# Altium PCB PCB1.PcbDoc (part 1 of 2)
Units mm, origin at the board's own origin, x right, y up, seen from the top; angles counter-clockwise.
Board outline 101 x 101.73 mm, 2 copper layers (Top Layer, Bottom Layer); 185 components, 17 nets, 503 pads, 7 vias.
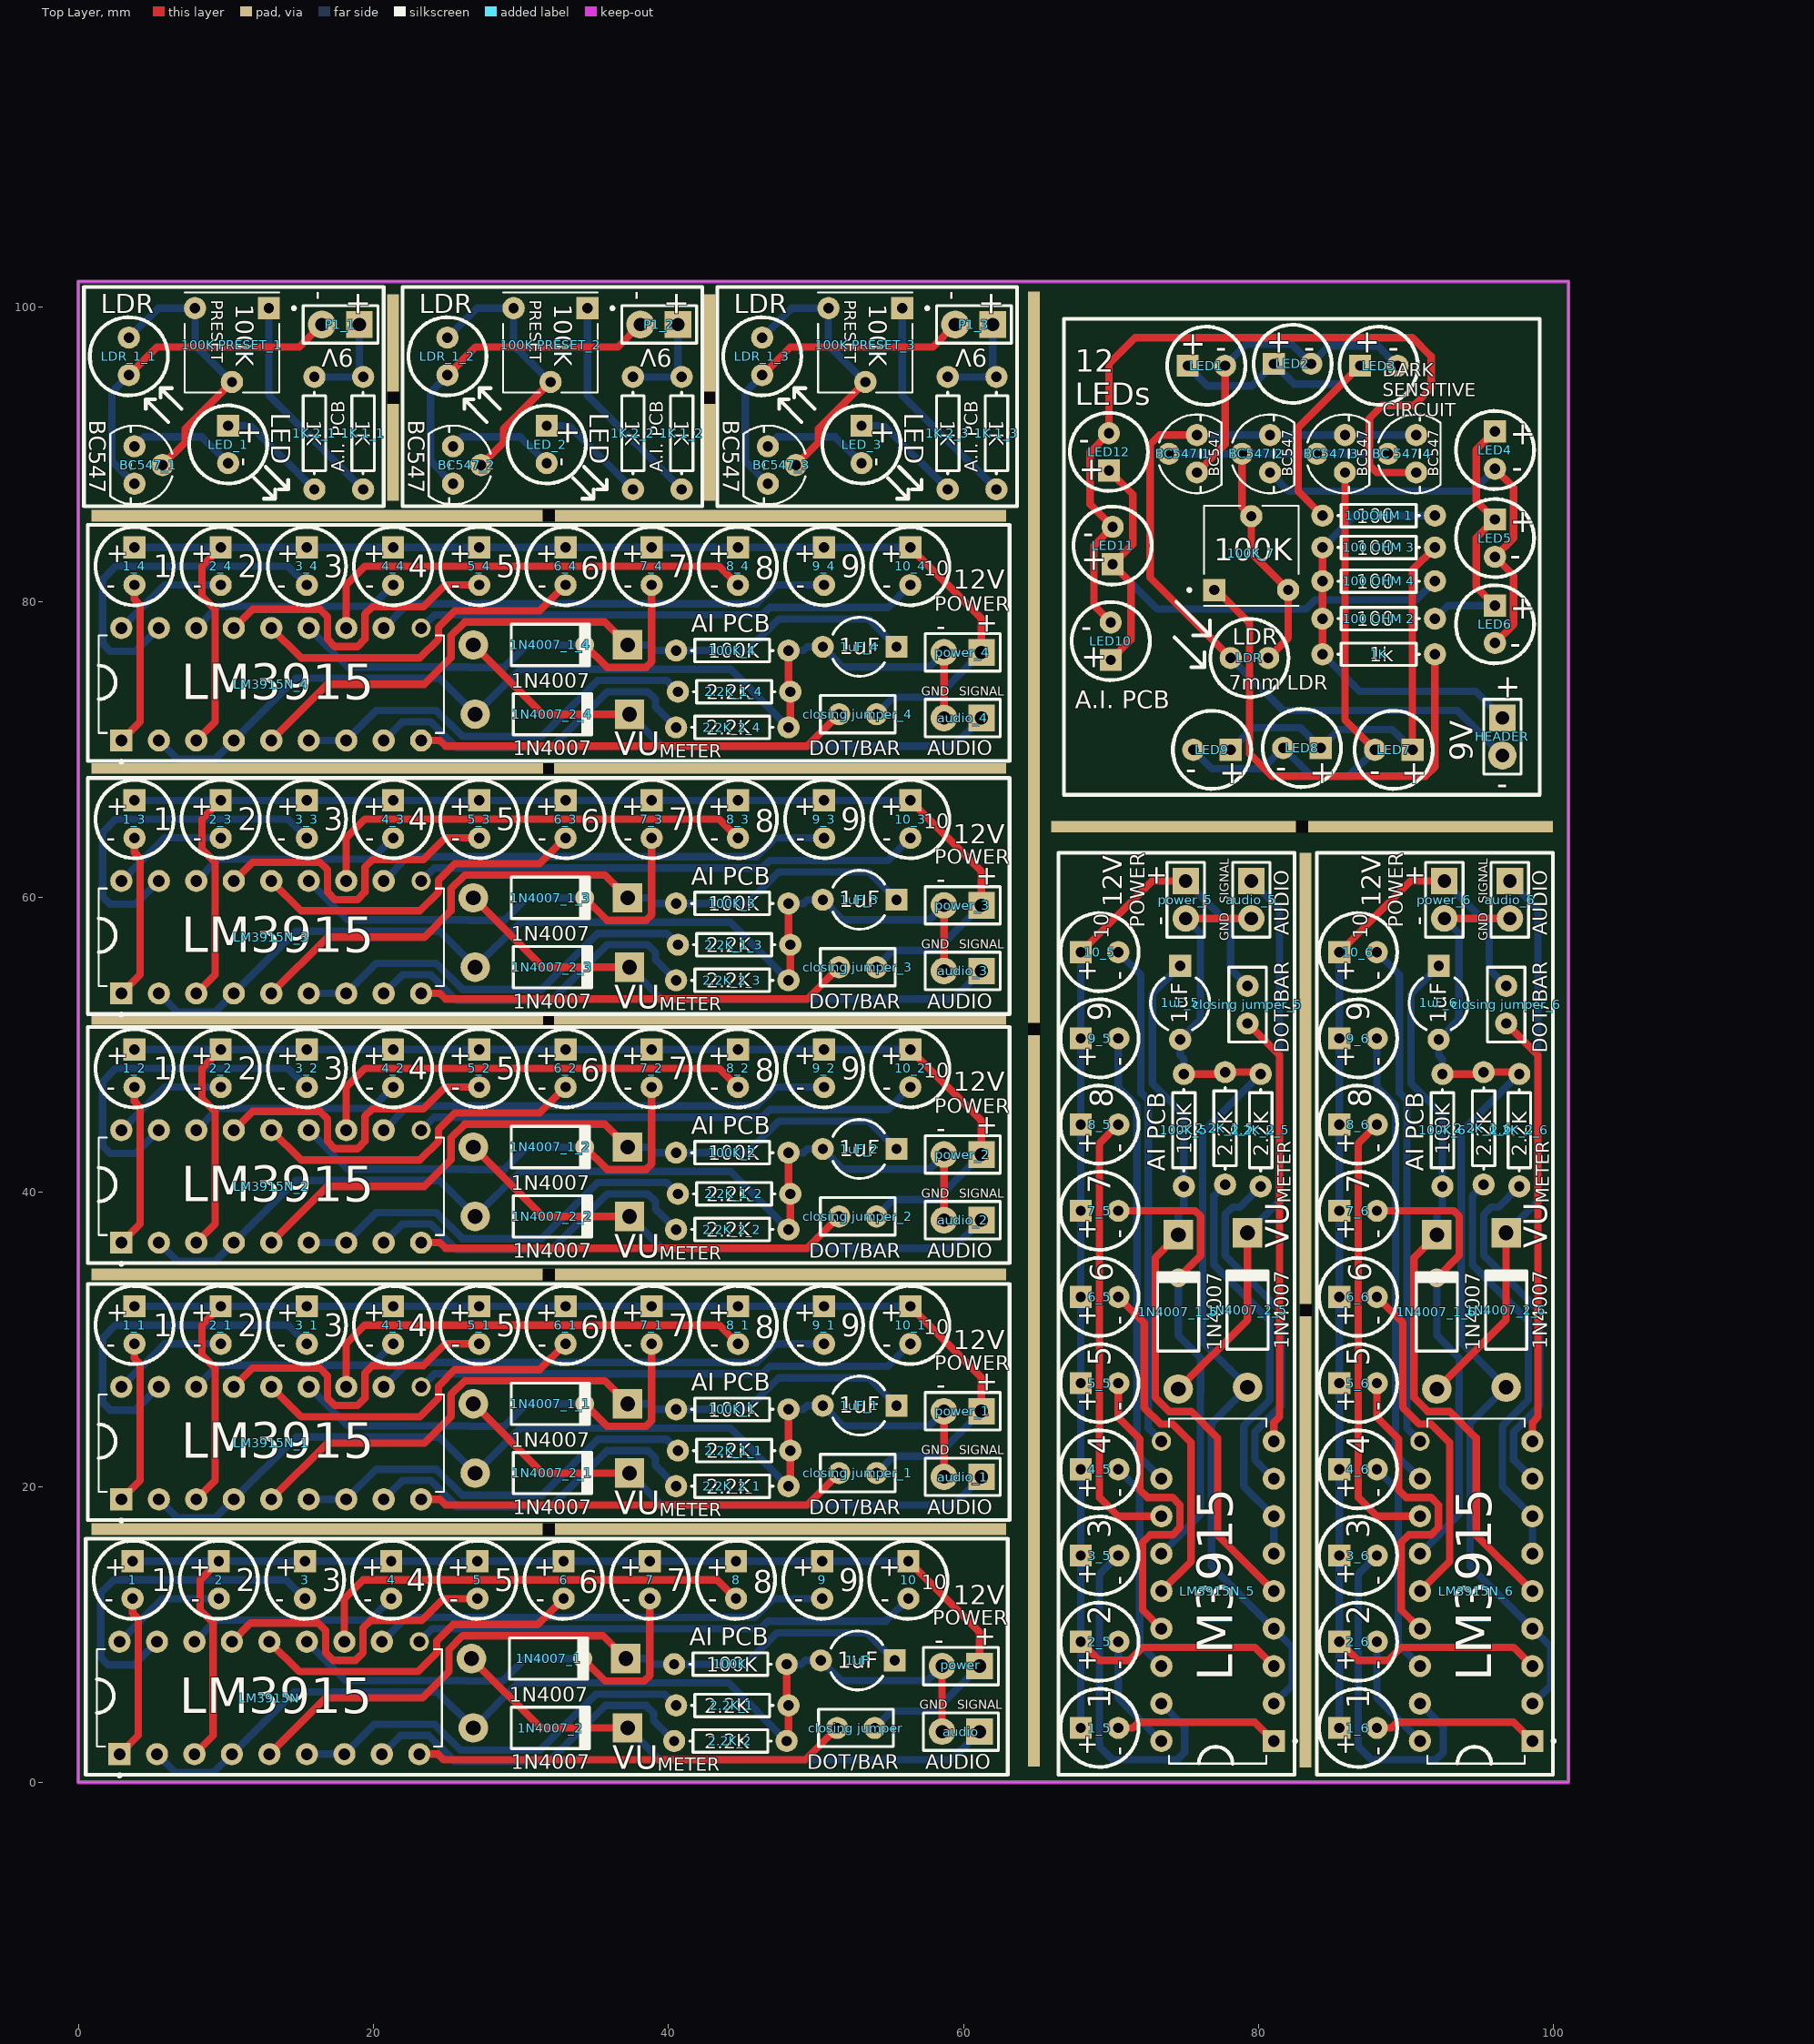
[diagram p0: Top Layer view]
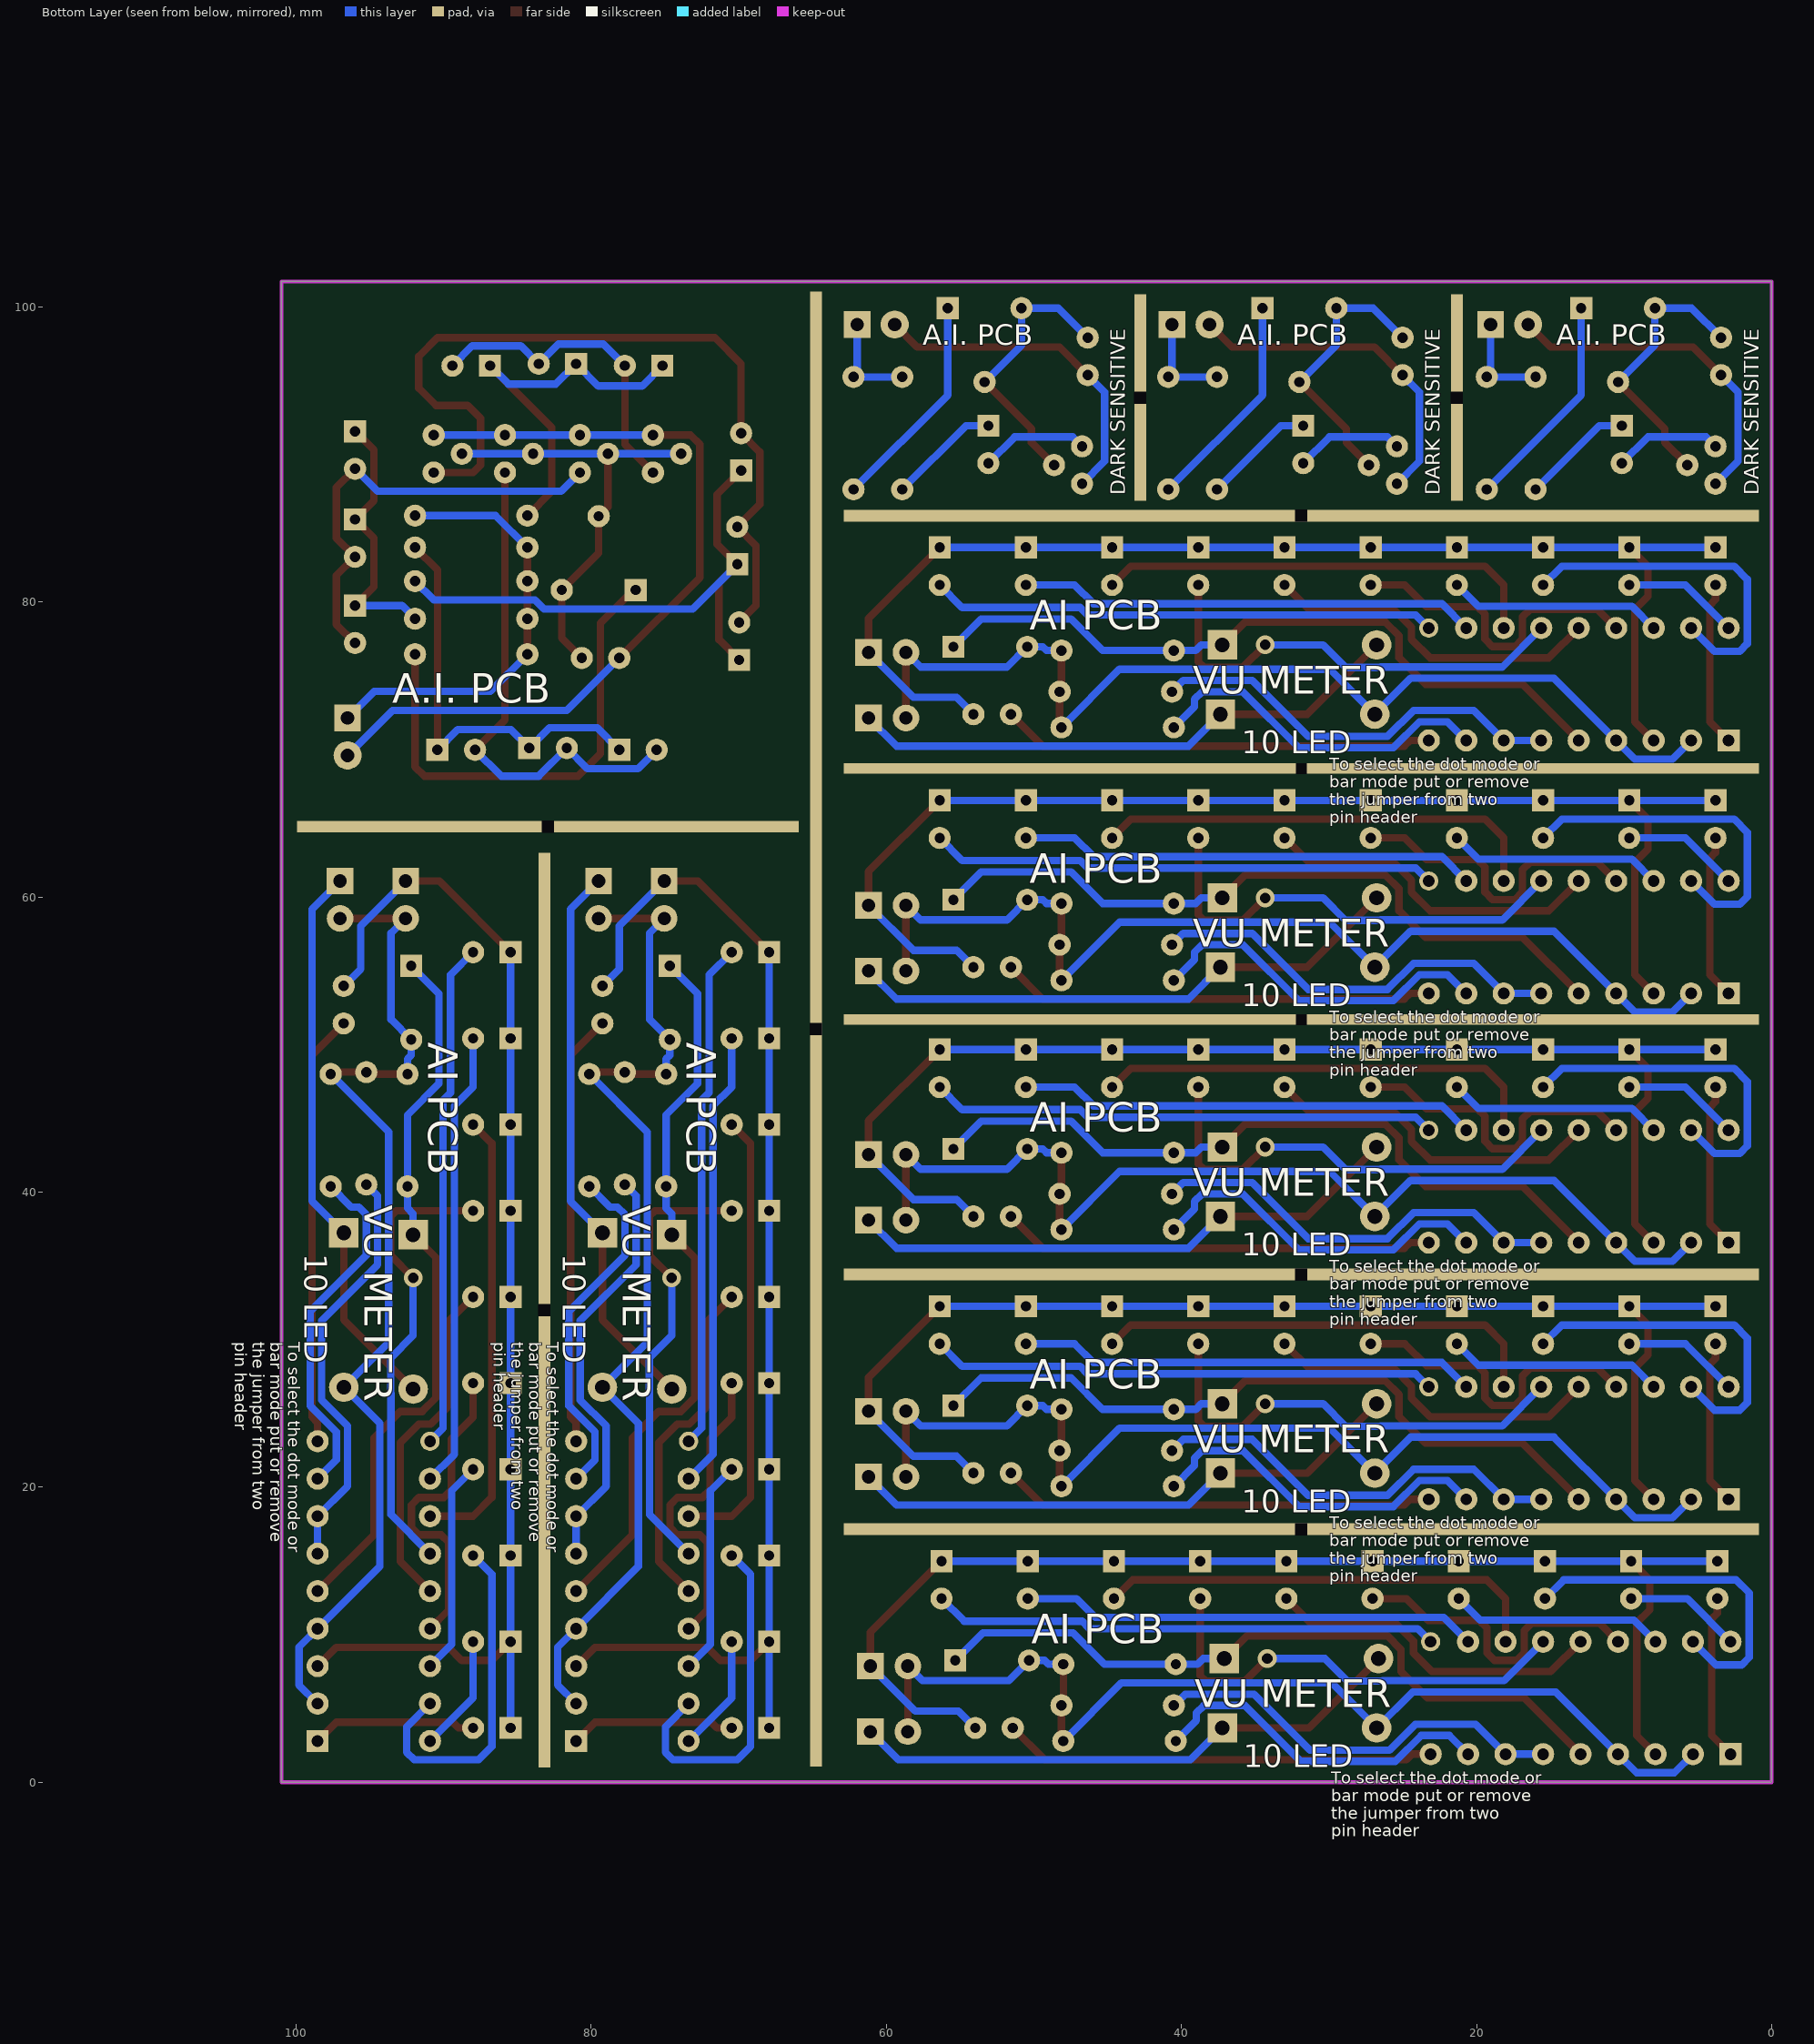
[diagram p1: Bottom Layer view, seen from below]

## Layer stack, top to bottom
Top Solder: solder mask 0.0102, Solder Resist, Dk 3.5
Top Layer: signal copper 0.0356
Dielectric 1: dielectric 0.32, FR-4, Dk 4.8
Bottom Layer: signal copper 0.0356
Bottom Solder: solder mask 0.0102, Solder Resist, Dk 3.5

## Board outline
0,0 0,101.727 101,101.727 101,0

## Design rules (kind name [scope] priority, off if disabled: settings)
Clearance [All] p1: gap=0.254 ignorepadtopadclearanceinfootprint=FALSE except(0: Arc-Hole Track-Hole SMDPad-Hole THPad-Hole Via-Hole Fill-Hole Poly-Hole Region-Hole Text-Hole)
PolygonConnect [All] p1: connectstyle=Relief reliefconductorwidth=0.254 reliefentries=4 polygonreliefangle="90 Angle" airgapwidth=0.254
RoutingVias [All] p1: holewidth=0.711 width=1.27 viastyle="Through Hole" minholewidth=0.711 minwidth=1.27 maxholewidth=0.711 maxwidth=1.27
SolderMaskExpansion [All] p1: expansion=0.102
Width [All] p1: maxlimit=0.762 minlimit=0.254 preferedwidth=0.508
30 further rules are at their usual default settings.

## Classes and differential pairs
component class Sheet1: 1 1N4007_1 1N4007_2 1uF 2 2.2K_1 2.2K_2 3 4 5 6 7 8 9 10 100K audio "closing jumper" "HEADER 2h" LM3915N MHDR power

## Components (designator, comment, footprint, x,y, rotation, side; value= is the part's Value field where it differs from the comment)
1 "L-53GD" L-53GD#1 3.683,13.716 r270 top
1_1 "L-53GD" L-53GD#1 3.81,30.988 r270 top (schematic designator 1)
1_2 "L-53GD" L-53GD#1 3.81,48.387 r270 top (schematic designator 1)
1_3 "L-53GD" L-53GD#1 3.81,65.278 r270 top (schematic designator 1)
1_4 "L-53GD" L-53GD#1 3.81,82.423 r270 top (schematic designator 1)
1_5 "L-53GD" L-53GD#1 69.215,3.683 r0 top (schematic designator 1)
1_6 "L-53GD" L-53GD#1 86.741,3.683 r0 top (schematic designator 1)
1K "Res1" AXIAL-0.3 88.138,76.454 r180 top value=1K
"1K 1_1" "Res1" AXIAL-0.3 19.304,91.44 r90 top value=1K (schematic designator "1K 1")
"1K 1_2" "Res1" AXIAL-0.3 40.894,91.44 r90 top value=1K (schematic designator "1K 1")
"1K 1_3" "Res1" AXIAL-0.3 62.23,91.44 r90 top value=1K (schematic designator "1K 1")
"1K 2_1" "Res1" AXIAL-0.3 16.002,91.44 r90 top value=1K (schematic designator "1K 2")
"1K 2_2" "Res1" AXIAL-0.3 37.592,91.44 r90 top value=1K (schematic designator "1K 2")
"1K 2_3" "Res1" AXIAL-0.3 58.928,91.44 r90 top value=1K (schematic designator "1K 2")
1N4007_1 "1N4007" DO-41 31.877,8.382 r0 top
1N4007_1_1 "1N4007" DO-41 32.004,25.654 r0 top (schematic designator 1N4007_1)
1N4007_1_2 "1N4007" DO-41 32.004,43.053 r0 top (schematic designator 1N4007_1)
1N4007_1_3 "1N4007" DO-41 32.004,59.944 r0 top (schematic designator 1N4007_1)
1N4007_1_4 "1N4007" DO-41 32.004,77.089 r0 top (schematic designator 1N4007_1)
1N4007_1_5 "1N4007" DO-41 74.549,31.877 r90 top (schematic designator 1N4007_1)
1N4007_1_6 "1N4007" DO-41 92.075,31.877 r90 top (schematic designator 1N4007_1)
1N4007_2 "Diode 1N4007" DO-41 32.004,3.683 r0 top
1N4007_2_1 "Diode 1N4007" DO-41 32.131,20.955 r0 top (schematic designator 1N4007_2)
1N4007_2_2 "Diode 1N4007" DO-41 32.131,38.354 r0 top (schematic designator 1N4007_2)
1N4007_2_3 "Diode 1N4007" DO-41 32.131,55.245 r0 top (schematic designator 1N4007_2)
1N4007_2_4 "Diode 1N4007" DO-41 32.131,72.39 r0 top (schematic designator 1N4007_2)
1N4007_2_5 "Diode 1N4007" DO-41 79.248,32.004 r90 top (schematic designator 1N4007_2)
1N4007_2_6 "Diode 1N4007" DO-41 96.774,32.004 r90 top (schematic designator 1N4007_2)
1uF "Cap2" CAPR5-4X5 52.832,8.255 r180 top value=100pF
1uF_1 "Cap2" CAPR5-4X5 52.959,25.527 r180 top value=100pF (schematic designator 1uF)
1uF_2 "Cap2" CAPR5-4X5 52.959,42.926 r180 top value=100pF (schematic designator 1uF)
1uF_3 "Cap2" CAPR5-4X5 52.959,59.817 r180 top value=100pF (schematic designator 1uF)
1uF_4 "Cap2" CAPR5-4X5 52.959,76.962 r180 top value=100pF (schematic designator 1uF)
1uF_5 "Cap2" CAPR5-4X5 74.676,52.832 r270 top value=100pF (schematic designator 1uF)
1uF_6 "Cap2" CAPR5-4X5 92.202,52.832 r270 top value=100pF (schematic designator 1uF)
2 "L-53GD" L-53GD#1 9.525,13.716 r270 top
2.2K_1 "Res1" AXIAL-0.3 44.323,5.207 r180 top value=1K
2.2K_1_1 "Res1" AXIAL-0.3 44.45,22.479 r180 top value=1K (schematic designator 2.2K_1)
2.2K_1_2 "Res1" AXIAL-0.3 44.45,39.878 r180 top value=1K (schematic designator 2.2K_1)
2.2K_1_3 "Res1" AXIAL-0.3 44.45,56.769 r180 top value=1K (schematic designator 2.2K_1)
2.2K_1_4 "Res1" AXIAL-0.3 44.45,73.914 r180 top value=1K (schematic designator 2.2K_1)
2.2K_1_5 "Res1" AXIAL-0.3 77.724,44.323 r270 top value=1K (schematic designator 2.2K_1)
2.2K_1_6 "Res1" AXIAL-0.3 95.25,44.323 r270 top value=1K (schematic designator 2.2K_1)
2.2K_2 "Res1" AXIAL-0.3 44.196,2.794 r180 top value=1K
2.2K_2_1 "Res1" AXIAL-0.3 44.323,20.066 r180 top value=1K (schematic designator 2.2K_2)
2.2K_2_2 "Res1" AXIAL-0.3 44.323,37.465 r180 top value=1K (schematic designator 2.2K_2)
2.2K_2_3 "Res1" AXIAL-0.3 44.323,54.356 r180 top value=1K (schematic designator 2.2K_2)
2.2K_2_4 "Res1" AXIAL-0.3 44.323,71.501 r180 top value=1K (schematic designator 2.2K_2)
2.2K_2_5 "Res1" AXIAL-0.3 80.137,44.196 r270 top value=1K (schematic designator 2.2K_2)
2.2K_2_6 "Res1" AXIAL-0.3 97.663,44.196 r270 top value=1K (schematic designator 2.2K_2)
2_1 "L-53GD" L-53GD#1 9.652,30.988 r270 top (schematic designator 2)
2_2 "L-53GD" L-53GD#1 9.652,48.387 r270 top (schematic designator 2)
2_3 "L-53GD" L-53GD#1 9.652,65.278 r270 top (schematic designator 2)
2_4 "L-53GD" L-53GD#1 9.652,82.423 r270 top (schematic designator 2)
2_5 "L-53GD" L-53GD#1 69.215,9.525 r0 top (schematic designator 2)
2_6 "L-53GD" L-53GD#1 86.741,9.525 r0 top (schematic designator 2)
3 "L-53GD" L-53GD#1 15.367,13.716 r270 top
3_1 "L-53GD" L-53GD#1 15.494,30.988 r270 top (schematic designator 3)
3_2 "L-53GD" L-53GD#1 15.494,48.387 r270 top (schematic designator 3)
3_3 "L-53GD" L-53GD#1 15.494,65.278 r270 top (schematic designator 3)
3_4 "L-53GD" L-53GD#1 15.494,82.423 r270 top (schematic designator 3)
3_5 "L-53GD" L-53GD#1 69.215,15.367 r0 top (schematic designator 3)
3_6 "L-53GD" L-53GD#1 86.741,15.367 r0 top (schematic designator 3)
4 "L-53GD" L-53GD#1 21.209,13.716 r270 top
4_1 "L-53GD" L-53GD#1 21.336,30.988 r270 top (schematic designator 4)
4_2 "L-53GD" L-53GD#1 21.336,48.387 r270 top (schematic designator 4)
4_3 "L-53GD" L-53GD#1 21.336,65.278 r270 top (schematic designator 4)
4_4 "L-53GD" L-53GD#1 21.336,82.423 r270 top (schematic designator 4)
4_5 "L-53GD" L-53GD#1 69.215,21.209 r0 top (schematic designator 4)
4_6 "L-53GD" L-53GD#1 86.741,21.209 r0 top (schematic designator 4)
5 "L-53GD" L-53GD#1 27.051,13.716 r270 top
5_1 "L-53GD" L-53GD#1 27.178,30.988 r270 top (schematic designator 5)
5_2 "L-53GD" L-53GD#1 27.178,48.387 r270 top (schematic designator 5)
5_3 "L-53GD" L-53GD#1 27.178,65.278 r270 top (schematic designator 5)
5_4 "L-53GD" L-53GD#1 27.178,82.423 r270 top (schematic designator 5)
5_5 "L-53GD" L-53GD#1 69.215,27.051 r0 top (schematic designator 5)
5_6 "L-53GD" L-53GD#1 86.741,27.051 r0 top (schematic designator 5)
6 "L-53GD" L-53GD#1 32.893,13.716 r270 top
6_1 "L-53GD" L-53GD#1 33.02,30.988 r270 top (schematic designator 6)
6_2 "L-53GD" L-53GD#1 33.02,48.387 r270 top (schematic designator 6)
6_3 "L-53GD" L-53GD#1 33.02,65.278 r270 top (schematic designator 6)
6_4 "L-53GD" L-53GD#1 33.02,82.423 r270 top (schematic designator 6)
6_5 "L-53GD" L-53GD#1 69.215,32.893 r0 top (schematic designator 6)
6_6 "L-53GD" L-53GD#1 86.741,32.893 r0 top (schematic designator 6)
7 "L-53GD" L-53GD#1 38.735,13.716 r270 top
7_1 "L-53GD" L-53GD#1 38.862,30.988 r270 top (schematic designator 7)
7_2 "L-53GD" L-53GD#1 38.862,48.387 r270 top (schematic designator 7)
7_3 "L-53GD" L-53GD#1 38.862,65.278 r270 top (schematic designator 7)
7_4 "L-53GD" L-53GD#1 38.862,82.423 r270 top (schematic designator 7)
7_5 "L-53GD" L-53GD#1 69.215,38.735 r0 top (schematic designator 7)
7_6 "L-53GD" L-53GD#1 86.741,38.735 r0 top (schematic designator 7)
8 "L-53GD" L-53GD#1 44.577,13.716 r270 top
8_1 "L-53GD" L-53GD#1 44.704,30.988 r270 top (schematic designator 8)
8_2 "L-53GD" L-53GD#1 44.704,48.387 r270 top (schematic designator 8)
8_3 "L-53GD" L-53GD#1 44.704,65.278 r270 top (schematic designator 8)
8_4 "L-53GD" L-53GD#1 44.704,82.423 r270 top (schematic designator 8)
8_5 "L-53GD" L-53GD#1 69.215,44.577 r0 top (schematic designator 8)
8_6 "L-53GD" L-53GD#1 86.741,44.577 r0 top (schematic designator 8)
9 "L-53GD" L-53GD#1 50.419,13.716 r270 top
9_1 "L-53GD" L-53GD#1 50.546,30.988 r270 top (schematic designator 9)
9_2 "L-53GD" L-53GD#1 50.546,48.387 r270 top (schematic designator 9)
9_3 "L-53GD" L-53GD#1 50.546,65.278 r270 top (schematic designator 9)
9_4 "L-53GD" L-53GD#1 50.546,82.423 r270 top (schematic designator 9)
9_5 "L-53GD" L-53GD#1 69.215,50.419 r0 top (schematic designator 9)
9_6 "L-53GD" L-53GD#1 86.741,50.419 r0 top (schematic designator 9)
10 "L-53GD" L-53GD#1 56.261,13.716 r270 top
10_1 "L-53GD" L-53GD#1 56.388,30.988 r270 top (schematic designator 10)
10_2 "L-53GD" L-53GD#1 56.388,48.387 r270 top (schematic designator 10)
10_3 "L-53GD" L-53GD#1 56.388,65.278 r270 top (schematic designator 10)
10_4 "L-53GD" L-53GD#1 56.388,82.423 r270 top (schematic designator 10)
10_5 "L-53GD" L-53GD#1 69.215,56.261 r0 top (schematic designator 10)
10_6 "L-53GD" L-53GD#1 86.741,56.261 r0 top (schematic designator 10)
"100 OHM 2" "Res1" AXIAL-0.3 88.138,78.867 r180 top value=1K
"100 OHM 3" "Res1" AXIAL-0.3 88.138,83.693 r180 top value=1K
"100 OHM 4" "Res1" AXIAL-0.3 88.138,81.407 r180 top value=1K
100K "Res1" AXIAL-0.3 44.196,8.001 r180 top value=1K
"100K PRESET_1" "" *TRIM_EVN-D8AA03B14 10.414,97.409 r180 top (schematic designator "100K PRESET")
"100K PRESET_2" "" *TRIM_EVN-D8AA03B14 32.004,97.409 r180 top (schematic designator "100K PRESET")
"100K PRESET_3" "" *TRIM_EVN-D8AA03B14 53.34,97.409 r180 top (schematic designator "100K PRESET")
100K_1 "Res1" AXIAL-0.3 44.323,25.273 r180 top value=1K (schematic designator 100K)
100K_2 "Res1" AXIAL-0.3 44.323,42.672 r180 top value=1K (schematic designator 100K)
100K_3 "Res1" AXIAL-0.3 44.323,59.563 r180 top value=1K (schematic designator 100K)
100K_4 "Res1" AXIAL-0.3 44.323,76.708 r180 top value=1K (schematic designator 100K)
100K_5 "Res1" AXIAL-0.3 74.93,44.196 r270 top value=1K (schematic designator 100K)
100K_6 "Res1" AXIAL-0.3 92.456,44.196 r270 top value=1K (schematic designator 100K)
100K_7 "" *TRIM_EVN-D8AA03B14 79.502,83.312 r0 top (schematic designator 100K)
"100OHM 1" "Res1" AXIAL-0.3 88.138,85.852 r0 top value=1K
audio "Header 2" HDR1X2#1 61.087,3.429 r180 top
audio_1 "Header 2" HDR1X2#1 61.214,20.701 r180 top (schematic designator audio)
audio_2 "Header 2" HDR1X2#1 61.214,38.1 r180 top (schematic designator audio)
audio_3 "Header 2" HDR1X2#1 61.214,54.991 r180 top (schematic designator audio)
audio_4 "Header 2" HDR1X2#1 61.214,72.136 r180 top (schematic designator audio)
audio_5 "Header 2" HDR1X2#1 79.502,61.087 r270 top (schematic designator audio)
audio_6 "Header 2" HDR1X2#1 97.028,61.087 r270 top (schematic designator audio)
"BC547 1" "BC547*" *TO92 75.819,90.043 r90 top
"BC547 2" "BC547*" *TO92 80.772,90.043 r90 top
"BC547 3" "BC547*" *TO92 85.852,90.043 r90 top
BC547_1 "BC547*" *TO92 3.81,89.281 r270 top (schematic designator BC547)
BC547_2 "BC547*" *TO92 25.4,89.281 r270 top (schematic designator BC547)
BC547_3 "BC547*" *TO92 46.736,89.281 r270 top (schematic designator BC547)
"BC 547 4" "BC547*" *TO92 90.678,90.043 r90 top
"closing jumper" "Header 2" HDR1X2#2 53.975,3.683 r180 top
"closing jumper_1" "Header 2" HDR1X2#2 54.102,20.955 r180 top (schematic designator "closing jumper")
"closing jumper_2" "Header 2" HDR1X2#2 54.102,38.354 r180 top (schematic designator "closing jumper")
"closing jumper_3" "Header 2" HDR1X2#2 54.102,55.245 r180 top (schematic designator "closing jumper")
"closing jumper_4" "Header 2" HDR1X2#2 54.102,72.39 r180 top (schematic designator "closing jumper")
"closing jumper_5" "Header 2" HDR1X2#2 79.248,53.975 r270 top (schematic designator "closing jumper")
"closing jumper_6" "Header 2" HDR1X2#2 96.774,53.975 r270 top (schematic designator "closing jumper")
HEADER "Header 2" HDR1X2#3 96.52,72.136 r270 top
LDR "L-53GD" L-53GD#2 79.375,76.2 r180 top
LDR_1_1 "L-53GD" L-53GD#2 3.429,96.647 r270 top (schematic designator LDR)
LDR_1_2 "L-53GD" L-53GD#2 25.019,96.647 r270 top (schematic designator LDR)
LDR_1_3 "L-53GD" L-53GD#2 46.355,96.647 r270 top (schematic designator LDR)
LED1 "L-53GD" L-53GD#1 76.454,96.012 r0 top
LED2 "L-53GD" L-53GD#1 82.296,96.139 r0 top
LED3 "L-53GD" L-53GD#1 88.138,96.012 r0 top
LED4 "L-53GD" L-53GD#1 96.012,90.297 r270 top
LED5 "L-53GD" L-53GD#1 96.012,84.328 r270 top
LED6 "L-53GD" L-53GD#1 96.012,78.486 r270 top
LED7 "L-53GD" L-53GD#1 89.154,69.977 r180 top
LED8 "L-53GD" L-53GD#1 82.931,70.104 r180 top
LED9 "L-53GD" L-53GD#1 76.835,69.977 r180 top
LED10 "L-53GD" L-53GD#1 69.977,77.343 r90 top
LED11 "L-53GD" L-53GD#1 70.104,83.82 r90 top
LED12 "L-53GD" L-53GD#1 69.85,90.17 r90 top
LED_1 "L-53GD" L-53GD#1 10.16,90.678 r270 top (schematic designator LED)
LED_2 "L-53GD" L-53GD#1 31.75,90.678 r270 top (schematic designator LED)
LED_3 "L-53GD" L-53GD#1 53.086,90.678 r270 top (schematic designator LED)
LM3915N "LM3915N" *DIP795W25P254L2337H533Q18B 12.954,5.715 r90 top
LM3915N_1 "LM3915N" *DIP795W25P254L2337H533Q18B 13.081,22.987 r90 top (schematic designator LM3915N)
LM3915N_2 "LM3915N" *DIP795W25P254L2337H533Q18B 13.081,40.386 r90 top (schematic designator LM3915N)
LM3915N_3 "LM3915N" *DIP795W25P254L2337H533Q18B 13.081,57.277 r90 top (schematic designator LM3915N)
LM3915N_4 "LM3915N" *DIP795W25P254L2337H533Q18B 13.081,74.422 r90 top (schematic designator LM3915N)
LM3915N_5 "LM3915N" *DIP795W25P254L2337H533Q18B 77.216,12.954 r180 top (schematic designator LM3915N)
LM3915N_6 "LM3915N" *DIP795W25P254L2337H533Q18B 94.742,12.954 r180 top (schematic designator LM3915N)
P1_1 "Header 2" HDR1X2#3 19.05,98.806 r180 top (schematic designator P1)
P1_2 "Header 2" HDR1X2#3 40.64,98.806 r180 top (schematic designator P1)
P1_3 "Header 2" HDR1X2#3 61.976,98.806 r180 top (schematic designator P1)
power "Header 2" HDR1X2#1 61.087,7.874 r180 top
power_1 "Header 2" HDR1X2#1 61.214,25.146 r180 top (schematic designator power)
power_2 "Header 2" HDR1X2#1 61.214,42.545 r180 top (schematic designator power)
power_3 "Header 2" HDR1X2#1 61.214,59.436 r180 top (schematic designator power)
power_4 "Header 2" HDR1X2#1 61.214,76.581 r180 top (schematic designator power)
power_5 "Header 2" HDR1X2#1 75.057,61.087 r270 top (schematic designator power)
power_6 "Header 2" HDR1X2#1 92.583,61.087 r270 top (schematic designator power)

## Footprints (in the part's own frame and the unit in brackets; to place one, negate y for a bottom-side part, rotate by r counter-clockwise, add the part's x,y. Pads: shape width x height; smd on the part's side, far side on the other; paste and mask are expansions set on the pad)
*DIP795W25P254L2337H533Q18B [mm]
  rect 1.5x1.5 hole 0.79: 1(-3.81,10.16)
  round 1.5 hole 0.79: 2(-3.81,7.62) 3(-3.81,5.08) 4(-3.81,2.54) 5(-3.81,0) 6(-3.81,-2.54) 7(-3.81,-5.08) 8(-3.81,-7.62) 9(-3.81,-10.16) 11(3.81,-7.62) 12(3.81,-5.08) 13(3.81,-2.54) 14(3.81,0) 15(3.81,2.54) 16(3.81,5.08) 17(3.81,7.62) 18(3.81,10.16)
  round 1.298 hole 0.79: 10(3.81,-10.16)
  silkscreen extent -5.35,-11.69 3.3,11.69
*TO92 [mm]
  round 1.5 hole 0.7: 1(-1.27,0) 2(0,1.905) 3(1.27,0)
  Top Layer region: -0.608,0.241 -0.972,0.638 -1.511,0.662 -1.908,0.298 -1.932,-0.241 -1.568,-0.638 -1.029,-0.662 -0.632,-0.298
  Top Layer region: 0.662,2.146 0.298,2.543 -0.241,2.567 -0.638,2.203 -0.662,1.664 -0.298,1.267 0.241,1.243 0.638,1.607
  Top Layer region: 1.932,0.241 1.568,0.638 1.029,0.662 0.632,0.298 0.608,-0.241 0.972,-0.638 1.511,-0.662 1.908,-0.298
  Bottom Layer region: -0.608,0.241 -0.972,0.638 -1.511,0.662 -1.908,0.298 -1.932,-0.241 -1.568,-0.638 -1.029,-0.662 -0.632,-0.298
  Bottom Layer region: 0.662,2.146 0.298,2.543 -0.241,2.567 -0.638,2.203 -0.662,1.664 -0.298,1.267 0.241,1.243 0.638,1.607
  Bottom Layer region: 1.932,0.241 1.568,0.638 1.029,0.662 0.632,0.298 0.608,-0.241 0.972,-0.638 1.511,-0.662 1.908,-0.298
  Multi-Layer region: -0.608,0.241 -0.972,0.638 -1.511,0.662 -1.908,0.298 -1.932,-0.241 -1.568,-0.638 -1.029,-0.662 -0.632,-0.298
  Multi-Layer region: 0.662,2.146 0.298,2.543 -0.241,2.567 -0.638,2.203 -0.662,1.664 -0.298,1.267 0.241,1.243 0.638,1.607
  Multi-Layer region: 1.932,0.241 1.568,0.638 1.029,0.662 0.632,0.298 0.608,-0.241 0.972,-0.638 1.511,-0.662 1.908,-0.298
  silkscreen extent -2.66,-1.65 2.66,2.55
*TRIM_EVN-D8AA03B14 [mm]
  rect 1.508x1.508 hole 0.7: 1(-2.5,-2.5)
  round 1.508 hole 0.7: 2(0,2.5) 3(2.5,-2.5)
  silkscreen extent -4.3,-3.57 3.2,3.2
AXIAL-0.3 [mm] "Axial Device, Thru-Hole; 2 Leads; 0.3 in Pin Spacing"
  round 1.5 hole 0.7: 1(-3.81,0) 2(3.81,0)
  silkscreen extent -2.77,-0.76 2.77,0.76
CAPR5-4X5 [mm] "Capacitor; 2 Leads"
  rect 1.5x1.5 hole 0.7: 1(-2.5,0)
  round 1.5 hole 0.7: 2(2.5,0)
  silkscreen extent -1.69,-2 1.82,2
DO-41 [mm] "Diode, Axial; Body 5.2 x 2.7 mm (LxDia. max), Lead Dia. 0.86 mm (max)"
  round 2 hole 1: 1(-5.23,0)
  rect 2x2 hole 1: 2(5.23,0)
  silkscreen extent -2.65,-1.4 2.75,1.4
HDR1X2#1 [mm] "Connector; Header; 2 Position"
  rect 1.8x1.8 hole 0.9: 1(0,0)
  round 1.8 hole 0.9: 2(2.54,0)
  silkscreen extent -1.27,-1.27 3.81,1.27
HDR1X2#2 [mm] "Connector; Header; 2 Position"
  round 1.5 hole 0.7: 1(0,0) 2(2.54,0)
  silkscreen extent -1.27,-1.27 3.81,1.27
HDR1X2#3 [mm] "Connector; Header; 2 Position"
  rect 1.8x1.8 hole 0.9: 1(0,0)
  round 1.9 hole 0.9: 2(2.54,0)
  silkscreen extent -1.27,-1.27 3.81,1.27
L-53GD#1 [mm]
  rect 1.5x1.5 hole 0.7: 1(-1.27,0)
  round 1.5 hole 0.7: 2(1.27,0)
  silkscreen extent -2.65,-2.65 2.65,2.65
L-53GD#2 [mm]
  round 1.5 hole 0.7: 1(-1.27,0) 2(1.27,0)
  silkscreen extent -2.65,-2.65 2.65,2.65

## Part data
1 1_1 1_2 1_3 1_4 1_5 1_6 2 2_1 2_2 2_3 2_4 2_5 2_6 3 3_1 3_2 3_3 3_4 3_5 3_6 4 4_1 4_2 4_3 4_4 4_5 4_6 5 5_1 5_2 5_3 5_4 5_5 5_6 6 6_1 6_2 6_3 6_4 6_5 6_6 7 7_1 7_2 7_3 7_4 7_5 7_6 8 8_1 8_2 8_3 8_4 8_5 8_6 9 9_1 9_2 9_3 9_4 9_5 9_6 10 10_1 10_2 10_3 10_4 10_5 10_6 LDR LDR_1_1 LDR_1_2 LDR_1_3 LED1 LED2 LED3 LED4 LED5 LED6 LED7 LED8 LED9 LED10 LED11 LED12 LED_1 LED_2 LED_3: "LED", Manufacturer_Name=Kingbright, Mouser Part Number=N/A, RS Part Number=2286004A, Allied_Number=70424261, Allied Price/Stock=http://www.alliedelec.com/kingbright-l-53gd/70424261/, Datasheet Link=http://docs-emea.rs-online.com/webdocs/151e/0900766b8151e408.pdf, Manufacturer_Part_Number=L-53GD, Mouser Price/Stock=https://www.mouser.com/Search/Refine.aspx?Keyword=N%2FA, RS Price/Stock=http://uk.rs-online.com/web/p/products/2286004A
1K "1K 1_1" "1K 1_2" "1K 1_3" "1K 2_1" "1K 2_2" "1K 2_3" 2.2K_1 2.2K_1_1 2.2K_1_2 2.2K_1_3 2.2K_1_4 2.2K_1_5 2.2K_1_6 2.2K_2 2.2K_2_1 2.2K_2_2 2.2K_2_3 2.2K_2_4 2.2K_2_5 2.2K_2_6 "100 OHM 2" "100 OHM 3" "100 OHM 4" 100K 100K_1 100K_2 100K_3 100K_4 100K_5 100K_6 "100OHM 1": "Resistor", LatestRevisionDate=17-Jul-2002, LatestRevisionNote="Re-released for DXP Platform.", PackageDescription="Axial Device, Thru-Hole; 2 Leads; 0.3 in Pin Spacing", PackageReference=AXIAL-0.3, Published=8-Jun-2000, Publisher="Altium Limited"
1N4007_1 1N4007_1_1 1N4007_1_2 1N4007_1_3 1N4007_1_4 1N4007_1_5 1N4007_1_6: library part "Diode 1N4007", "1 Amp General Purpose Rectifier", Code_JEDEC=DO-204-AL, ComponentLink1Description="Manufacturer Link", ComponentLink1URL=http://www.fairchildsemi.com/, ComponentLink2Description=Datasheet, ComponentLink2URL=http://www.fairchildsemi.com/ds/1N%2F1N4001.pdf, DatasheetVersion=1998, LatestRevisionDate=17-Jul-2002, LatestRevisionNote="Re-released for DXP Platform.", PackageDescription="Diode, Axial; Body 5.2 x 2.7 mm (LxDia. max), Lead Dia. 0.86 mm (max)", PackageReference=DO-41, PackageVersion=Aug-1999, Published=8-Jun-2000, Publisher="Altium Limited"
1N4007_2 1N4007_2_1 1N4007_2_2 1N4007_2_3 1N4007_2_4 1N4007_2_5 1N4007_2_6: "1 Amp General Purpose Rectifier", Code_JEDEC=DO-204-AL, ComponentLink1Description="Manufacturer Link", ComponentLink1URL=http://www.fairchildsemi.com/, ComponentLink2Description=Datasheet, ComponentLink2URL=http://www.fairchildsemi.com/ds/1N%2F1N4001.pdf, DatasheetVersion=1998, LatestRevisionDate=17-Jul-2002, LatestRevisionNote="Re-released for DXP Platform.", PackageDescription="Diode, Axial; Body 5.2 x 2.7 mm (LxDia. max), Lead Dia. 0.86 mm (max)", PackageReference=DO-41, PackageVersion=Aug-1999, Published=8-Jun-2000, Publisher="Altium Limited"
1uF 1uF_1 1uF_2 1uF_3 1uF_4 1uF_5 1uF_6: "Capacitor", PackageDescription="Capacitor; 2 Leads", PackageReference=CAPR5-4X5, Published=23-Sep-2002, Publisher="Altium Limited"
"100K PRESET_1" "100K PRESET_2" "100K PRESET_3" 100K_7: library part EVN-D8AA03B14, "Trimmer; Carbon; Rest 10 Kilohms; PCB; 1 Turn; Pwr-Rtg 0.1 W; Linear; Top Adj; 6 mm SQ", Package="PQFP-44 Panasonic", Availability=Unavailable, MF="Panasonic Electronic", MP=EVN-D8AA03B14, Price=None, SnapEDA_Link=https://www.snapeda.com/parts/EVN-D8AA03B14/Panasonic%20Electronic%20Components/view-part/?ref=snap
audio audio_1 audio_2 audio_3 audio_4 audio_5 audio_6 "closing jumper" "closing jumper_1" "closing jumper_2" "closing jumper_3" "closing jumper_4" "closing jumper_5" "closing jumper_6" HEADER P1_1 P1_2 P1_3 power power_1 power_2 power_3 power_4 power_5 power_6: "Header, 2-Pin", LatestRevisionDate=17-Jul-2002, LatestRevisionNote="Re-released for DXP Platform.", Publisher="Altium Limited"
"BC547 1" "BC547 2" "BC547 3" BC547_1 BC547_2 BC547_3 "BC 547 4": "Transistor NPN BC547 PHILIPS miliampere=100 TO92", Package="TO-92 ON Semiconductor", Availability=Unavailable, MF="ON Semiconductor", MP=BC547, Price=None, SnapEDA_Link=https://www.snapeda.com/parts/BC547/ON%20Semiconductor/view-part/?ref=snap
LM3915N LM3915N_1 LM3915N_2 LM3915N_3 LM3915N_4 LM3915N_5 LM3915N_6: library part LM3915N-1, "LED DRVR 10Segment 3.3V/5V/9V/12V/15V/18V/24V 18-Pin PDIP Tube", Package="DIP-18 Texas Instruments", Availability=Unavailable, MF="Texas Instruments", MP=LM3915N-1, Price=None, SnapEDA_Link=https://www.snapeda.com/parts/LM3915N-1/Texas%20Instruments/view-part/?ref=snap

## Free pads (board coordinates)
  rect 0.8x14 hole 0.8 square: 2(21.336,93.853) 2(42.799,93.853)
  rect 62x0.8 hole 0.8 square: 2(31.877,17.145) 2(31.877,34.417) 2(31.877,85.852)
  rect 62x0.7 hole 0.7 square: 2(31.877,51.689) 2(31.877,68.707)
  rect 0.8x100 hole 0.8 square: 2(64.77,51.054)
  rect 34x0.8 hole 0.8 square: 2(82.931,64.77)
  rect 0.8x62 hole 0.8 square: 2(83.185,32.004)

## Via types
v1: diameter 1.27, hole 0.711, Top Layer to Bottom Layer, 7 vias

## Nets (pads, with @x,y where several pads share a name; then routed paths per layer and width w, separated by ;. In a path a pad name is that pad's centre, name@x,y a point inside that pad or via, vN(x,y) a via of type N, cw(c..) or ccw(c..) an arc to the next point about the centre after c; other vN are vias at no path point)
Net1_1: 1.1 2.1 3.1 4.1 5.1 6.1 7.1 8.1 9.1 10.1 "closing jumper.1" LM3915N.3 power.1 | length 85
  Top Layer w0.508: LM3915N.3@7.874,1.905 9.144,3.175 9.144,10.795 8.255,11.684 8.255,13.716 2.1@9.525,14.986 ; 10.1@56.261,14.986 61.087,10.16 power.1@61.087,7.874
  Bottom Layer w0.508: 1.1@3.683,14.986 2.1@9.525,14.986 3.1@15.367,14.986 4.1@21.209,14.986 5.1@27.051,14.986 6.1@32.893,14.986 7.1@38.735,14.986 8.1@44.577,14.986 9.1@50.419,14.986 10.1@56.261,14.986 ; 53.975,3.683 55.118,4.826 58.039,4.826 power.1@61.087,7.874
Net1_2: 1.2 LM3915N.1 | length 11.2
  Top Layer w0.508: LM3915N.1@2.794,1.905 4.064,3.175 4.064,11.074 3.683,11.455 1.2@3.683,12.446
Net1N4007_1_1: 1N4007_1.1 1N4007_2.2 audio.1 | length 38.1
  Top Layer w0.508: 1N4007_1.1@26.647,8.382 31.346,3.683 1N4007_2.2@37.234,3.683
  Bottom Layer w0.508: 1N4007_2.2@37.234,3.683 39.393,1.524 59.182,1.524 audio.1@61.087,3.429
Net1N4007_1_2: 1N4007_1.2 1uF.1 100K.2 LM3915N.5 | length 49
  Top Layer w0.508: LM3915N.5@12.954,1.905 16.764,5.715 23.334,5.715 25.129,7.51 25.129,9 26.06,9.931 35.558,9.931 1N4007_1.2@37.107,8.382
  Bottom Layer w0.508: 1N4007_1.2@37.107,8.382 38.532,8.382 38.913,8.001 100K.2@40.386,8.001 45.225,8.001 47.359,10.135 53.452,10.135 1uF.1@55.332,8.255
Net1N4007_2_1: 1N4007_2.1 1uF.2 2.2K_1.1 2.2K_2.1 100K.1 audio.2 LM3915N.2 LM3915N.4 power.2 | length 70.7
  Top Layer w0.508: 2.2K_2.1@48.006,2.794 48.006,3.048 48.133,3.175 2.2K_1.1@48.133,5.207 48.006,5.334 100K.1@48.006,8.001 ; audio.2@58.547,3.429 power.2@58.547,7.874
  Bottom Layer w0.508: LM3915N.2@5.334,1.905 6.592,0.647 9.156,0.647 LM3915N.4@10.414,1.905 14.63,6.121 24.336,6.121 1N4007_2.1@26.774,3.683 29.822,6.731 44.069,6.731 2.2K_2.1@48.006,2.794 ; 100K.1@48.006,8.001 49.022,8.001 49.276,8.255 1uF.2@50.332,8.255 51.704,6.883 57.556,6.883 power.2@58.547,7.874
Net2.2K_1_2: 2.2K_1.2 LM3915N.6 LM3915N.7 | length 28.5
  Bottom Layer w0.508: LM3915N.6@15.494,1.905 LM3915N.7@18.034,1.905 20.066,3.937 24.146,3.937 25.908,2.175 31.283,2.175 35.077,5.969 39.751,5.969 2.2K_1.2@40.513,5.207
Net2.2K_2_2: 2.2K_2.2 LM3915N.8 | length 23.9
  Bottom Layer w0.508: LM3915N.8@20.574,1.905 21.844,3.175 23.749,3.175 25.511,1.413 31.918,1.413 35.712,5.207 38.481,5.207 38.989,4.699 38.989,4.191 2.2K_2.2@40.386,2.794
Net2_2: 2.2 LM3915N.18 | length 7.9
  Bottom Layer w0.508: LM3915N.18@2.794,9.525 5.715,12.446 2.2@9.525,12.446
Net3_2: 3.2 LM3915N.17 | length 23.8
  Bottom Layer w0.508: LM3915N.17@5.334,9.525 3.759,7.95 2.032,7.95 1.524,8.458 1.524,12.827 2.413,13.716 14.097,13.716 3.2@15.367,12.446
Net4_2: 4.2 LM3915N.16 | length 14.5
  Bottom Layer w0.508: LM3915N.16@7.874,9.525 9.347,10.998 19.761,10.998 4.2@21.209,12.446
Net5_2: 5.2 LM3915N.15 | length 21.8
  Top Layer w0.508: LM3915N.15@10.414,9.525 11.684,10.795 16.256,10.795 16.764,10.287 16.764,8.775 17.272,8.267 18.796,8.267 19.304,8.775 19.304,10.465 19.812,10.973 23.266,10.973 24.74,12.446 5.2@27.051,12.446
Net6_2: 6.2 LM3915N.14 | length 23.3
  Top Layer w0.508: LM3915N.14@12.954,9.525 14.974,7.505 23.024,7.505 24.282,8.763 24.282,9.576 25.4,10.693 31.14,10.693 6.2@32.893,12.446
Net7_2: 7.2 LM3915N.13 | length 31
  Top Layer w0.508: v1(34.188,8.382) 35.712,6.858 38.354,6.858 38.735,7.239 7.2@38.735,12.446
  Bottom Layer w0.508: LM3915N.13@15.494,9.525 18.136,6.883 26.365,6.883 26.391,6.858 28.753,6.858 30.277,8.382 v1(34.188,8.382)
Net8_2: 8.2 LM3915N.12 | length 30.5
  Top Layer w0.508: LM3915N.12@18.034,9.525 18.034,12.446 19.304,13.716 43.307,13.716 8.2@44.577,12.446
Net9_2: 9.2 LM3915N.11 | length 31.1
  Bottom Layer w0.508: LM3915N.11@20.574,9.525 22.225,11.176 45.847,11.176 47.117,12.446 9.2@50.419,12.446
Net10_2: 10.2 LM3915N.10 | length 34.4
  Bottom Layer w0.508: LM3915N.10@23.114,9.525 23.996,10.407 46.228,10.407 46.74,10.918 54.733,10.918 10.2@56.261,12.446
"Netclosing jumper_2": "closing jumper.2" LM3915N.9 | length 29.4
  Top Layer w0.508: LM3915N.9@23.114,1.905 24.384,1.905 24.765,1.524 49.276,1.524 51.435,3.683
pads on no net: 1_1.1 1_1.2 1_2.1 1_2.2 1_3.1 1_3.2 1_4.1 1_4.2 1_5.1 1_5.2 1_6.1 1_6.2 1K.1 1K.2 1N4007_1_1.1 1N4007_1_1.2 1N4007_1_2.1 1N4007_1_2.2 1N4007_1_3.1 1N4007_1_3.2 1N4007_1_4.1 1N4007_1_4.2 1N4007_1_5.1 1N4007_1_5.2 1N4007_1_6.1 1N4007_1_6.2 1N4007_2_1.1 1N4007_2_1.2 1N4007_2_2.1 1N4007_2_2.2 1N4007_2_3.1 1N4007_2_3.2 1N4007_2_4.1 1N4007_2_4.2 1N4007_2_5.1 1N4007_2_5.2 1N4007_2_6.1 1N4007_2_6.2 1uF_1.1 1uF_1.2 1uF_2.1 1uF_2.2 1uF_3.1 1uF_3.2 1uF_4.1 1uF_4.2 1uF_5.1 1uF_5.2 1uF_6.1 1uF_6.2 2.2K_1_1.1 2.2K_1_1.2 2.2K_1_2.1 2.2K_1_2.2 2.2K_1_3.1 2.2K_1_3.2 2.2K_1_4.1 2.2K_1_4.2 2.2K_1_5.1 2.2K_1_5.2 2.2K_1_6.1 2.2K_1_6.2 2.2K_2_1.1 2.2K_2_1.2 2.2K_2_2.1 2.2K_2_2.2 2.2K_2_3.1 2.2K_2_3.2 2.2K_2_4.1 2.2K_2_4.2 2.2K_2_5.1 2.2K_2_5.2 2.2K_2_6.1 2.2K_2_6.2 2_1.1 2_1.2 2_2.1 2_2.2 2_3.1 2_3.2 2_4.1 2_4.2 2_5.1 2_5.2 2_6.1 2_6.2 3_1.1 3_1.2 3_2.1 3_2.2 3_3.1 3_3.2 3_4.1 3_4.2 3_5.1 3_5.2 3_6.1 3_6.2 4_1.1 4_1.2 4_2.1 4_2.2 4_3.1 4_3.2 4_4.1 4_4.2 4_5.1 4_5.2 4_6.1 4_6.2 5_1.1 5_1.2 5_2.1 5_2.2 5_3.1 5_3.2 5_4.1 5_4.2 5_5.1 5_5.2 5_6.1 5_6.2 6_1.1 6_1.2 6_2.1 6_2.2 6_3.1 6_3.2 6_4.1 6_4.2 6_5.1 6_5.2 6_6.1 6_6.2 7_1.1 7_1.2 7_2.1 7_2.2 7_3.1 7_3.2 7_4.1 7_4.2 7_5.1 7_5.2 7_6.1 7_6.2 8_1.1 8_1.2 8_2.1 8_2.2 8_3.1 8_3.2 8_4.1 8_4.2 8_5.1 8_5.2 8_6.1 8_6.2 9_1.1 9_1.2 9_2.1 9_2.2 9_3.1 9_3.2 9_4.1 9_4.2 9_5.1 9_5.2 9_6.1 9_6.2 10_1.1 10_1.2 10_2.1 10_2.2 10_3.1 10_3.2 10_4.1 10_4.2 10_5.1 10_5.2 10_6.1 10_6.2 100K_1.1 100K_1.2 100K_2.1 100K_2.2 100K_3.1 100K_3.2 100K_4.1 100K_4.2 100K_5.1 100K_5.2 100K_6.1 100K_6.2 100K_7.1 100K_7.2 100K_7.3 "1K 1_1.1" "1K 1_1.2" "1K 1_2.1" "1K 1_2.2" "1K 1_3.1" "1K 1_3.2" "1K 2_1.1" "1K 2_1.2" "1K 2_2.1" "1K 2_2.2" "1K 2_3.1" "1K 2_3.2" "100 OHM 2.1" "100 OHM 2.2" "100 OHM 3.1" "100 OHM 3.2" "100 OHM 4.1" "100 OHM 4.2" "100K PRESET_1.1" "100K PRESET_1.2" "100K PRESET_1.3" "100K PRESET_2.1" "100K PRESET_2.2" "100K PRESET_2.3" "100K PRESET_3.1" "100K PRESET_3.2" "100K PRESET_3.3" "100OHM 1.1" "100OHM 1.2" "BC547 1.1" "BC547 1.2" "BC547 1.3" "BC547 2.1" "BC547 2.2" "BC547 2.3" "BC547 3.1" "BC547 3.2" "BC547 3.3" "BC 547 4.1" "BC 547 4.2" "BC 547 4.3" "closing jumper_1.1" "closing jumper_1.2" "closing jumper_2.1" "closing jumper_2.2" "closing jumper_3.1" "closing jumper_3.2" "closing jumper_4.1" "closing jumper_4.2" "closing jumper_5.1" "closing jumper_5.2" "closing jumper_6.1" "closing jumper_6.2" audio_1.1 audio_1.2 audio_2.1 audio_2.2 audio_3.1 audio_3.2 audio_4.1 audio_4.2 audio_5.1 audio_5.2 audio_6.1 audio_6.2 BC547_1.1 BC547_1.2 BC547_1.3 BC547_2.1 BC547_2.2 BC547_2.3 BC547_3.1 BC547_3.2 BC547_3.3 HEADER.1 HEADER.2 LDR.1 LDR.2 LDR_1_1.1 LDR_1_1.2 LDR_1_2.1 LDR_1_2.2 LDR_1_3.1 LDR_1_3.2 LED1.1 LED1.2 LED2.1 LED2.2 LED3.1 LED3.2 LED4.1 LED4.2 LED5.1 LED5.2 LED6.1 LED6.2 LED7.1 LED7.2 LED8.1 LED8.2 LED9.1 LED9.2 LED10.1 LED10.2 LED11.1 LED11.2 LED12.1 LED12.2 LED_1.1 LED_1.2 LED_2.1 LED_2.2 LED_3.1 LED_3.2 LM3915N_1.1 LM3915N_1.2 LM3915N_1.3 LM3915N_1.4 LM3915N_1.5 LM3915N_1.6 LM3915N_1.7 LM3915N_1.8 LM3915N_1.9 LM3915N_1.10 LM3915N_1.11 LM3915N_1.12 LM3915N_1.13 LM3915N_1.14 LM3915N_1.15 LM3915N_1.16 LM3915N_1.17 LM3915N_1.18 LM3915N_2.1 LM3915N_2.2 LM3915N_2.3 LM3915N_2.4 LM3915N_2.5 LM3915N_2.6 LM3915N_2.7 LM3915N_2.8 LM3915N_2.9 LM3915N_2.10 LM3915N_2.11 LM3915N_2.12 LM3915N_2.13 LM3915N_2.14 LM3915N_2.15 LM3915N_2.16 LM3915N_2.17 LM3915N_2.18 LM3915N_3.1 LM3915N_3.2 LM3915N_3.3 LM3915N_3.4 LM3915N_3.5 LM3915N_3.6 LM3915N_3.7 LM3915N_3.8 LM3915N_3.9 LM3915N_3.10 LM3915N_3.11 LM3915N_3.12 LM3915N_3.13 LM3915N_3.14 LM3915N_3.15 LM3915N_3.16 LM3915N_3.17 LM3915N_3.18 LM3915N_4.1 LM3915N_4.2 LM3915N_4.3 LM3915N_4.4 LM3915N_4.5 LM3915N_4.6 LM3915N_4.7 LM3915N_4.8 LM3915N_4.9 LM3915N_4.10 LM3915N_4.11 LM3915N_4.12 LM3915N_4.13 LM3915N_4.14 LM3915N_4.15 LM3915N_4.16 LM3915N_4.17 LM3915N_4.18 LM3915N_5.1 LM3915N_5.2 LM3915N_5.3 LM3915N_5.4 LM3915N_5.5 LM3915N_5.6 LM3915N_5.7 LM3915N_5.8 LM3915N_5.9 LM3915N_5.10 LM3915N_5.11 LM3915N_5.12 LM3915N_5.13 LM3915N_5.14 LM3915N_5.15 LM3915N_5.16 LM3915N_5.17 LM3915N_5.18 LM3915N_6.1 LM3915N_6.2 LM3915N_6.3 LM3915N_6.4 LM3915N_6.5 LM3915N_6.6 LM3915N_6.7 LM3915N_6.8 LM3915N_6.9 LM3915N_6.10 LM3915N_6.11 LM3915N_6.12 LM3915N_6.13 LM3915N_6.14 LM3915N_6.15 LM3915N_6.16 LM3915N_6.17 LM3915N_6.18 P1_1.1 P1_1.2 P1_2.1 P1_2.2 P1_3.1 P1_3.2 power_1.1 power_1.2 power_2.1 power_2.2 power_3.1 power_3.2 power_4.1 power_4.2 power_5.1 power_5.2 power_6.1 power_6.2